# Altium PCB Awtrix Finally.pcbdoc (part 4 of 4)
Units mil, origin at the board's own origin, x right, y up, seen from the top; angles counter-clockwise.
Board outline 8820 x 2812 mil, 2 copper layers (Top Layer, Bottom Layer); 513 components, 259 nets, 1543 pads, 743 vias.
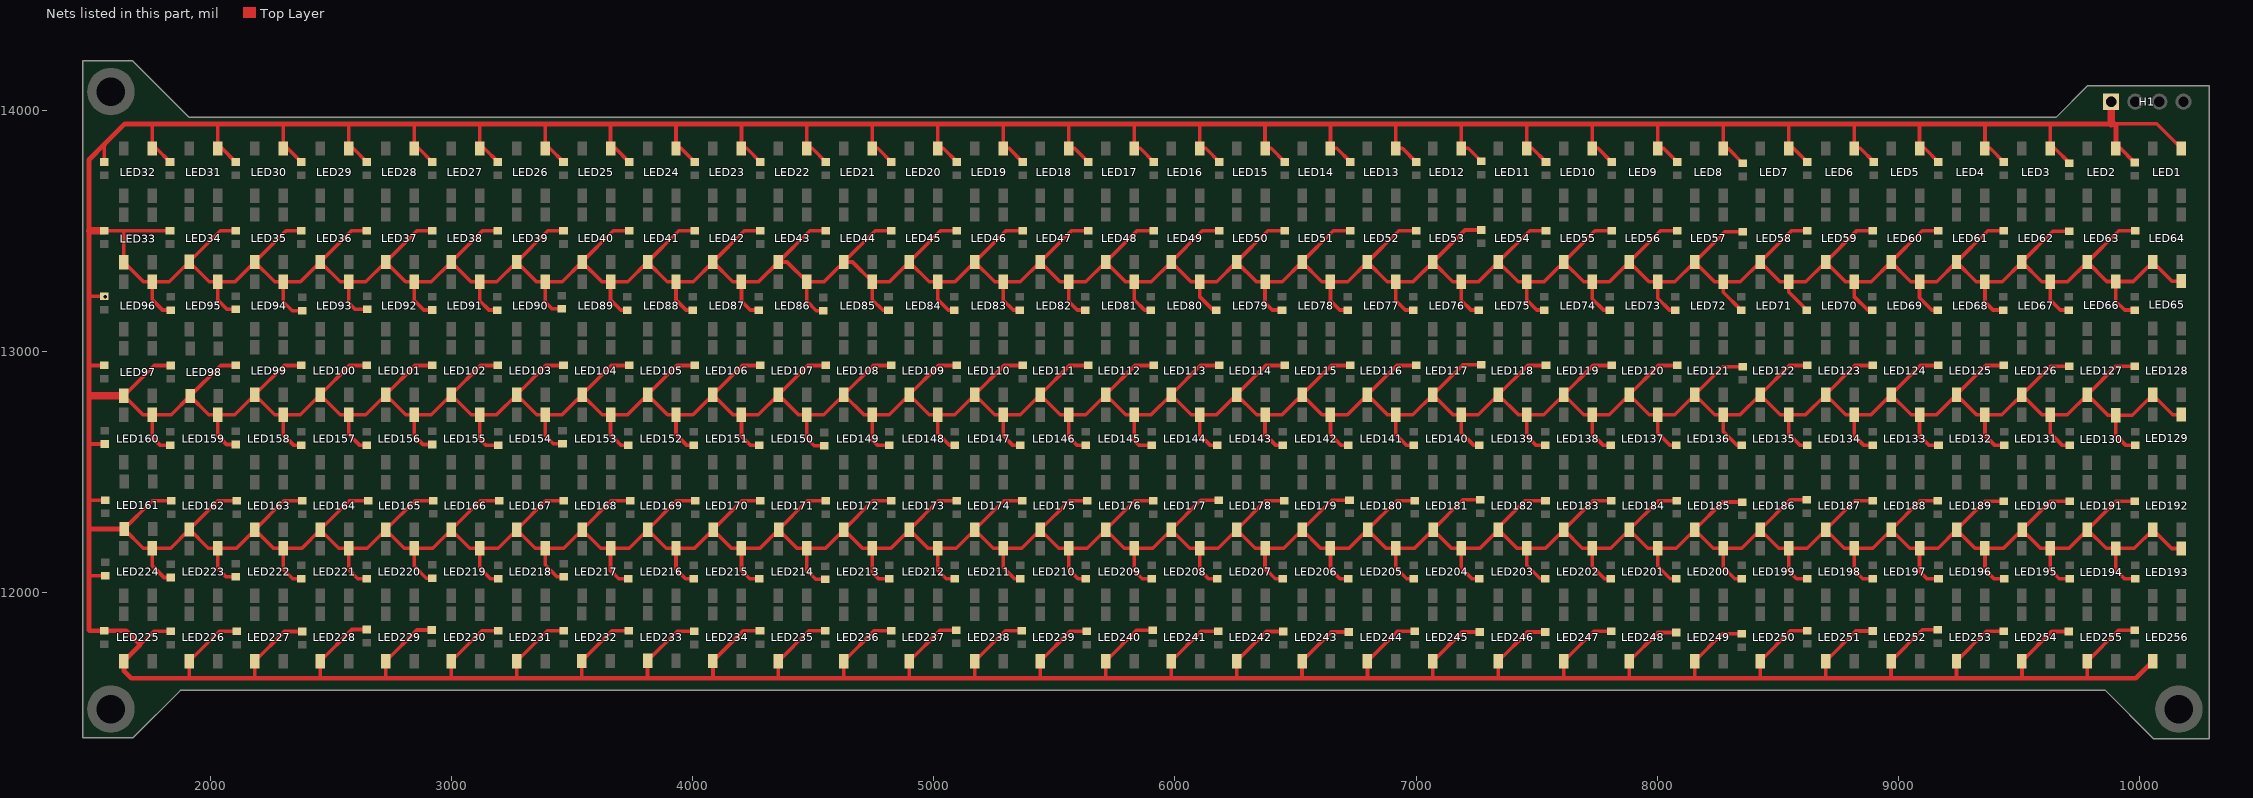
[diagram p4: the nets of this part, all layers, seen from the top]

## Via types
v1: diameter 20, hole 15, Top Layer to Bottom Layer, 743 vias

## Nets (pads, with @x,y where several pads share a name; then routed paths per layer and width w, separated by ;. In a path a pad name is that pad's centre, name@x,y a point inside that pad or via, vN(x,y) a via of type N, cw(c..) or ccw(c..) an arc to the next point about the centre after c; other vN are vias at no path point) (continued)
VCC: C1.2 C2.2 C3.2 C4.2 C5.2 C6.2 C7.2 C8.2 C9.2 C10.2 C11.2 C12.2 C13.2 C14.2 C15.2 C16.2 C17.2 C18.2 C19.2 C20.2 C21.2 C22.2 C23.2 C24.2 C25.2 C26.2 C27.2 C28.2 C29.2 C30.2 C31.2 C32.2 C33.2 C34.2 C35.2 C36.2 C37.2 C38.2 C39.2 C40.2 C41.2 C42.2 C43.2 C44.2 C45.2 C46.2 C47.2 C48.2 C49.2 C50.2 C51.2 C52.2 C53.2 C54.2 C55.2 C56.2 C57.2 C58.2 C59.2 C60.2 C61.2 C62.2 C63.2 C64.2 C65.2 C66.2 C67.2 C68.2 C69.2 C70.2 C71.2 C72.2 C73.2 C74.2 C75.2 C76.2 C77.2 C78.2 C79.2 C80.2 C81.2 C82.2 C83.2 C84.2 C85.2 C86.2 C87.2 C88.2 C89.2 C90.2 C91.2 C92.2 C93.2 C94.2 C95.2 C96.2 C97.2 C98.2 C99.2 C100.2 C101.2 C102.2 C103.2 C104.2 C105.2 C106.2 C107.2 C108.2 C109.2 C110.2 C111.2 C112.2 C113.2 C114.2 C115.2 C116.2 C117.2 C118.2 C119.2 C120.2 C121.2 C122.2 C123.2 C124.2 C125.2 C126.2 C127.2 C128.2 C129.2 C130.2 C131.2 C132.2 C133.2 C134.2 C135.2 C136.2 C137.2 C138.2 C139.2 C140.2 C141.2 C142.2 C143.2 C144.2 C145.2 C146.2 C147.2 C148.2 C149.2 C150.2 C151.2 C152.2 C153.2 C154.2 C155.2 C156.2 C157.2 C158.2 C159.2 C160.2 C161.2 C162.2 C163.2 C164.2 C165.2 C166.2 C167.2 C168.2 C169.2 C170.2 C171.2 C172.2 C173.2 C174.2 C175.2 C176.2 C177.2 C178.2 C179.2 C180.2 C181.2 C182.2 C183.2 C184.2 C185.2 C186.2 C187.2 C188.2 C189.2 C190.2 C191.2 C192.2 C193.2 C194.2 C195.2 C196.2 C197.2 C198.2 C199.2 C200.2 C201.2 C202.2 C203.2 C204.2 C205.2 C206.2 C207.2 C208.2 C209.2 C210.2 C211.2 C212.2 C213.2 C214.2 C215.2 C216.2 C217.2 C218.2 C219.2 C220.2 C221.2 C222.2 C223.2 C224.2 C225.2 C226.2 C227.2 C228.2 C229.2 C230.2 C231.2 C232.2 C233.2 C234.2 C235.2 C236.2 C237.2 C238.2 C239.2 C240.2 C241.2 C242.2 C243.2 C244.2 C245.2 C246.2 C247.2 C248.2 C249.2 C250.2 C251.2 C252.2 C253.2 C254.2 C255.2 C256.2 H1.1 LED1.1 LED2.1 LED3.1 LED4.1 LED5.1 LED6.1 LED7.1 LED8.1 LED9.1 LED10.1 LED11.1 LED12.1 LED13.1 LED14.1 LED15.1 LED16.1 LED17.1 LED18.1 LED19.1 LED20.1 LED21.1 LED22.1 LED23.1 LED24.1 LED25.1 LED26.1 LED27.1 LED28.1 LED29.1 LED30.1 LED31.1 LED32.1 LED33.1 LED34.1 LED35.1 LED36.1 LED37.1 LED38.1 LED39.1 LED40.1 LED41.1 LED42.1 LED43.1 LED44.1 LED45.1 LED46.1 LED47.1 LED48.1 LED49.1 LED50.1 LED51.1 LED52.1 LED53.1 LED54.1 LED55.1 LED56.1 LED57.1 LED58.1 LED59.1 LED60.1 LED61.1 LED62.1 LED63.1 LED64.1 LED65.1 LED66.1 LED67.1 LED68.1 LED69.1 LED70.1 LED71.1 LED72.1 LED73.1 LED74.1 LED75.1 LED76.1 LED77.1 LED78.1 LED79.1 LED80.1 LED81.1 LED82.1 LED83.1 LED84.1 LED85.1 LED86.1 LED87.1 LED88.1 LED89.1 LED90.1 LED91.1 LED92.1 LED93.1 LED94.1 LED95.1 LED96.1 LED97.1 LED98.1 LED99.1 LED100.1 LED101.1 LED102.1 LED103.1 LED104.1 LED105.1 LED106.1 LED107.1 LED108.1 LED109.1 LED110.1 LED111.1 LED112.1 LED113.1 LED114.1 LED115.1 LED116.1 LED117.1 LED118.1 LED119.1 LED120.1 LED121.1 LED122.1 LED123.1 LED124.1 LED125.1 LED126.1 LED127.1 LED128.1 LED129.1 LED130.1 LED131.1 LED132.1 LED133.1 LED134.1 LED135.1 LED136.1 LED137.1 LED138.1 LED139.1 LED140.1 LED141.1 LED142.1 LED143.1 LED144.1 LED145.1 LED146.1 LED147.1 LED148.1 LED149.1 LED150.1 LED151.1 LED152.1 LED153.1 LED154.1 LED155.1 LED156.1 LED157.1 LED158.1 LED159.1 LED160.1 LED161.1 LED162.1 LED163.1 LED164.1 LED165.1 LED166.1 LED167.1 LED168.1 LED169.1 LED170.1 LED171.1 LED172.1 LED173.1 LED174.1 LED175.1 LED176.1 LED177.1 LED178.1 LED179.1 LED180.1 LED181.1 LED182.1 LED183.1 LED184.1 LED185.1 LED186.1 LED187.1 LED188.1 LED189.1 LED190.1 LED191.1 LED192.1 LED193.1 LED194.1 LED195.1 LED196.1 LED197.1 LED198.1 LED199.1 LED200.1 LED201.1 LED202.1 LED203.1 LED204.1 LED205.1 LED206.1 LED207.1 LED208.1 LED209.1 LED210.1 LED211.1 LED212.1 LED213.1 LED214.1 LED215.1 LED216.1 LED217.1 LED218.1 LED219.1 LED220.1 LED221.1 LED222.1 LED223.1 LED224.1 LED225.1 LED226.1 LED227.1 LED228.1 LED229.1 LED230.1 LED231.1 LED232.1 LED233.1 LED234.1 LED235.1 LED236.1 LED237.1 LED238.1 LED239.1 LED240.1 LED241.1 LED242.1 LED243.1 LED244.1 LED245.1 LED246.1 LED247.1 LED248.1 LED249.1 LED250.1 LED251.1 LED252.1 LED253.1 LED254.1 LED255.1 LED256.1 | length 107613.2
  Top Layer w15: 1496,11845 1498.44,11842.56 ; 1496,12073 1497.56,12071.44 C50.2@1563,12071.44 ; 1496,12619 1497.56,12617.44 C197.2@1562,12617.44 ; 1497,13232 1499.44,13229.56 C97.2@1560,13229.56 ; 1498.44,12384.56 C81.2@1563,12384.56 ; 1501,12943.11 C154.2@1560,12943.11 ; C126.2@1560,13501.96 1640.95,13501.96 ; C109.2@1560,13786.96 1560,13860 ; 1708.91,11784.53 1764.93,11840.56 C61.2@1836,11840.56 ; 1765,13945 1759.05,13939.05 LED32.1@1759.05,13843.43 1775.54,13843.43 C167.2@1832,13786.96 ; C184.2@1832,13501.96 1640.95,13501.96 ; C75.2@1832.96,12612.85 1790.15,12612.85 1759.06,12643.94 LED160.1@1759.06,12738.53 ; C62.2@1835,12063.44 1806.99,12063.44 1759.06,12111.38 LED224.1@1759.06,12185.14 ; C155.2@1835,12943 1766.52,12943 LED97.1@1640.95,12817.43 1719.85,12738.53 LED160.1@1759.06,12738.53 ; C73.2@1835,13172.89 1801.11,13172.89 1759.06,13214.94 LED96.1@1759.06,13290 ; C82.2@1837.4,12381.65 1758.35,12381.65 LED161.1@1641.35,12264.65 1720.86,12185.14 LED224.1@1759.06,12185.14 ; 1918,11646 1912.4,11651.6 LED226.1@1912.4,11716.57 2036.38,11840.56 C63.2@2108,11840.56 ; 2025,13945 2030.5,13939.5 LED31.1@2030.5,13843.43 2047.54,13843.43 C227.2@2104,13786.96 ; C156.2@2104,12943.11 2041.96,12943.11 LED98.1@1915,12816.15 ; C244.2@2104,13501.96 2040.71,13501.96 LED34.1@1911.9,13373.15 ; C37.2@2105,12066 2065,12066 2030.51,12100.49 LED223.1@2030.51,12185.14 ; C67.2@2105,12615.41 2066.59,12615.41 2030.51,12651.49 LED159.1@2030.51,12738.53 ; C251.2@2105,13175.44 2069.55,13175.44 2030.51,13214.49 LED95.1@2030.51,13290 ; C83.2@2109.4,12381.65 2031.23,12381.65 LED162.1@1912.8,12263.22 ; 2186,11646 2183.85,11648.15 LED227.1@2183.85,11716.57 2307.13,11839.85 C64.2@2381,11839.85 ; 2301.95,13945 LED30.1@2301.95,13843.43 2319.54,13843.43 C110.2@2376,13786.96 ; C157.2@2376,12943.11 2305.24,12943.11 LED99.1@2183.85,12821.72 ; C125.2@2376,13501.96 2313.52,13501.96 LED35.1@2183.85,13372.29 ; C36.2@2376.96,12058.7 2341.3,12058.7 2301.96,12098.04 LED222.1@2301.96,12185.14 ; C226.2@2376.96,12612.85 2344.15,12612.85 2301.96,12655.04 LED158.1@2301.96,12738.53 ; C191.2@2380,13170.44 2338.55,13170.44 2301.96,13207.04 LED94.1@2301.96,13290 ; C84.2@2381.41,12381.65 2304.11,12381.65 LED163.1@2184.25,12261.79 ; 2456,11646 2455.3,11646.7 LED228.1@2455.3,11716.57 2586.73,11848 C60.2@2648,11848 ; 2573.4,13945 LED29.1@2573.4,13843.43 2591.54,13843.43 C168.2@2648.01,13786.96 ; C158.2@2648.01,12943.11 2576.69,12943.11 LED100.1@2455.3,12821.72 ; C183.2@2648.01,13501.96 2584.98,13501.96 LED36.1@2455.3,13372.29 ; C24.2@2648.96,12058.7 2611.3,12058.7 2573.41,12096.59 LED221.1@2573.41,12185.14 ; C225.2@2648.96,12612.85 2618.15,12612.85 2573.41,12657.59 LED157.1@2573.41,12738.53 ; C133.2@2650,13175.44 2600.55,13175.44 2573.41,13202.59 LED93.1@2573.41,13290 ; C85.2@2653.41,12381.65 2575.56,12381.65 LED164.1@2455.7,12261.79 ; 2728,11646 2726.75,11647.25 LED229.1@2726.75,11716.57 2856.05,11845.87 C57.2@2917.75,11845.87 ; 2850,13945 2844.85,13939.85 LED28.1@2844.85,13843.43 2863.54,13843.43 C228.2@2920.01,13786.96 ; C25.2@2920,12061 2895,12061 2844.86,12111.14 LED220.1@2844.86,12185.14 ; C224.2@2920,12615.41 2881.59,12615.41 2844.86,12652.14 LED156.1@2844.86,12738.53 ; C159.2@2920.01,12943.11 2848.15,12943.11 LED101.1@2726.75,12821.72 ; C77.2@2920,13173 2884,13173 2844.86,13212.14 LED92.1@2844.86,13290 ; C243.2@2920.01,13501.96 2856.43,13501.96 LED37.1@2726.75,13372.29 ; C86.2@2923,12382.56 2847.92,12382.56 LED165.1@2727.16,12261.79 ; 3002,11646 2998.21,11649.79 LED230.1@2998.21,11716.57 3124.8,11843.17 C6.2@3192.76,11843.17 ; 3110,13945 3116.3,13938.7 LED27.1@3116.3,13843.43 3135.55,13843.43 C111.2@3192.01,13786.96 ; C69.2@3189.97,13172.89 3155.11,13172.89 3116.31,13211.69 LED91.1@3116.31,13290 ; C160.2@3192.01,12943.11 3119.6,12943.11 LED102.1@2998.21,12821.72 ; C124.2@3192.01,13501.96 3127.88,13501.96 LED38.1@2998.21,13372.29 ; C26.2@3192.96,12058.7 3161.3,12058.7 3116.31,12103.69 LED219.1@3116.31,12185.14 ; C223.2@3192.96,12612.85 3142.15,12612.85 3116.31,12638.69 LED155.1@3116.31,12738.53 ; C87.2@3197.41,12381.65 3118.46,12381.65 LED166.1@2998.61,12261.79 ; 3266,11646 3269.66,11649.66 LED231.1@3269.66,11716.57 3396.25,11843.17 C58.2@3464.76,11843.17 ; 3385,13945 3387.75,13942.25 LED26.1@3387.75,13843.43 3407.55,13843.43 C169.2@3464.01,13786.96 ; C250.2@3456.97,13177.89 3416.11,13177.89 3387.76,13206.24 LED90.1@3387.76,13290 ; C222.2@3459.97,12617.85 3422.15,12617.85 3387.76,12652.24 LED154.1@3387.76,12738.53 ; C161.2@3464.01,12943.11 3391.05,12943.11 LED103.1@3269.66,12821.72 ; C182.2@3464.01,13501.96 3399.33,13501.96 LED39.1@3269.66,13372.29 ; C27.2@3465,12066 3438,12066 3387.76,12116.24 LED218.1@3387.76,12185.14 ; C88.2@3465,12381.56 3389.82,12381.56 LED167.1@3270.06,12261.79 ; 3538,11646 3540,11648 LED232.1@3540,11717.15 3666.41,11843.56 C59.2@3735,11843.56 ; 3660,13945 3659.21,13944.21 LED25.1@3659.21,13843.43 3679.55,13843.43 C229.2@3736.01,13786.96 ; C190.2@3728.97,13172.89 3701.11,13172.89 3659.22,13214.78 LED89.1@3659.22,13290 ; C28.2@3731.97,12058.7 3693.3,12058.7 3659.22,12092.78 LED217.1@3659.22,12185.14 ; C221.2@3731.97,12612.85 3701.15,12612.85 3659.22,12654.78 LED153.1@3659.22,12738.53 ; C162.2@3736.01,12943.11 3662.5,12943.11 LED104.1@3541.11,12821.72 ; C242.2@3736.01,13501.96 3670.78,13501.96 LED40.1@3541.11,13372.29 ; C89.2@3741.41,12381.65 3661.37,12381.65 LED168.1@3541.51,12261.79 ; 3820,11646 3812.57,11653.43 LED233.1@3812.57,11718.15 3935.29,11840.87 C7.2@4005.75,11840.87 ; 3925,13945 3930.66,13939.34 LED24.1@3930.66,13843.43 3951.55,13843.43 C112.2@4008.01,13786.96 ; C132.2@4000.97,13172.89 3972.11,13172.89 3930.67,13214.33 LED88.1@3930.67,13290 ; C29.2@4003.97,12058.7 3970.3,12058.7 3930.67,12098.33 LED216.1@3930.67,12185.14 ; C220.2@4003.97,12612.85 3974.15,12612.85 3930.67,12656.33 LED152.1@3930.67,12738.53 ; C163.2@4008.01,12943.11 3933.95,12943.11 LED105.1@3812.56,12821.72 ; C127.2@4008.01,13501.96 3942.23,13501.96 LED41.1@3812.56,13372.29 ; C90.2@4010,12381.56 3932.72,12381.56 LED169.1@3812.96,12261.79 ; 4084,11646 LED234.1@4084,11717.15 4208.85,11842 C56.2@4279,11842 ; 4202.12,12092.88 4236.3,12058.7 C3.2@4275.97,12058.7 ; 4202.12,12096.12 LED215.1@4202.12,12185.14 ; 4210,13945 4202.11,13937.11 LED23.1@4202.11,13843.43 4223.55,13843.43 C170.2@4280.01,13786.96 ; C76.2@4272.97,13172.89 4238.11,13172.89 4202.12,13208.88 LED87.1@4202.12,13290 ; C219.2@4275.97,12612.85 4238.15,12612.85 4202.12,12648.88 LED151.1@4202.12,12738.53 ; C164.2@4280.01,12943.11 4205.4,12943.11 LED106.1@4084.01,12821.72 ; C185.2@4280.01,13501.96 4213.69,13501.96 LED42.1@4084.01,13372.29 ; C91.2@4281,12381.56 4204.18,12381.56 LED170.1@4084.41,12261.79 ; 4353,11646 4355.46,11648.46 LED235.1@4355.46,11716.57 4481.44,11842.56 C55.2@4550,11842.56 ; 4470,13945 4473.56,13941.44 LED22.1@4473.56,13843.43 4495.55,13843.43 C230.2@4552.02,13786.96 ; C68.2@4542,13169.85 4512.15,13169.85 4473.57,13208.43 LED86.1@4473.57,13290 ; C218.2@4545,12609.82 4504.04,12609.82 4473.57,12640.28 LED150.1@4473.57,12738.53 ; C30.2@4550,12055.89 4510.11,12055.89 4473.57,12092.43 LED214.1@4473.57,12185.14 ; C92.2@4552,12381.56 4475.63,12381.56 LED171.1@4355.86,12261.79 ; C165.2@4552.02,12943.11 4476.86,12943.11 LED107.1@4355.46,12821.72 ; C245.2@4552.02,13501.96 4485.14,13501.96 LED43.1@4355.46,13372.29 ; 4625,11646 4626.91,11647.91 LED236.1@4626.91,11716.57 4753.9,11843.56 C54.2@4823,11843.56 ; 4750,13945 4745.01,13940.01 LED21.1@4745.01,13843.43 4767.55,13843.43 C113.2@4824.02,13786.96 ; C249.2@4811.97,13172.89 4788.11,13172.89 4745.02,13215.98 LED85.1@4745.02,13290 ; C31.2@4814.97,12058.7 4770.3,12058.7 4745.02,12083.98 LED213.1@4745.02,12185.14 ; C217.2@4814.97,12612.85 4766.15,12612.85 4745.02,12633.98 LED149.1@4745.02,12738.53 ; C93.2@4823,12381.56 4747.08,12381.56 LED172.1@4627.32,12261.79 ; C166.2@4824.02,12943.11 4748.31,12943.11 LED108.1@4626.91,12821.72 ; C128.2@4824.02,13501.96 4756.59,13501.96 LED44.1@4626.91,13372.29 ; 4898.37,11657.37 LED237.1@4898.37,11716.57 5027.35,11845.56 C53.2@5093,11845.56 ; 5020,13945 5016.46,13941.46 LED20.1@5016.46,13843.43 5039.56,13843.43 C171.2@5096.02,13786.96 ; C189.2@5083.97,13172.89 5060.11,13172.89 5016.47,13216.53 LED84.1@5016.47,13290 ; C32.2@5086.97,12058.7 5051.3,12058.7 5016.47,12093.53 LED212.1@5016.47,12185.14 ; C216.2@5086.97,12612.85 5064.15,12612.85 5016.47,12660.53 LED148.1@5016.47,12738.53 ; C94.2@5095,12381.56 5018.53,12381.56 LED173.1@4898.77,12261.79 ; C196.2@5096.02,12943.11 5019.76,12943.11 LED109.1@4898.37,12821.72 ; C186.2@5096.02,13501.96 5028.04,13501.96 LED45.1@4898.37,13372.29 ; 5171,11646 5169.82,11647.18 LED238.1@5169.82,11716.57 5295.8,11842.56 C52.2@5365,11842.56 ; 5285,13945 5287.91,13942.09 LED19.1@5287.91,13843.43 5311.56,13843.43 C231.2@5368.02,13786.96 ; C131.2@5355.98,13172.89 5329.11,13172.89 5287.93,13214.08 LED83.1@5287.93,13290 ; C33.2@5358.97,12058.7 5334.3,12058.7 5287.93,12105.08 LED211.1@5287.93,12185.14 ; C215.2@5358.97,12612.85 5326.15,12612.85 5287.93,12651.08 LED147.1@5287.93,12738.53 ; C95.2@5366,12381.56 5289.98,12381.56 LED174.1@5170.22,12261.79 ; C256.2@5368.02,12943.11 5291.21,12943.11 LED110.1@5169.82,12821.72 ; C246.2@5368.02,13501.96 5299.49,13501.96 LED46.1@5169.82,13372.29 ; 5438,11646 5441.27,11649.27 LED239.1@5441.27,11716.57 5564.7,11840 C51.2@5635,11840 ; 5560,13945 5559.37,13944.37 LED18.1@5559.37,13843.43 5583.56,13843.43 C187.2@5640.02,13786.96 ; C188.2@5627.98,13172.89 5595.11,13172.89 5559.38,13208.62 LED82.1@5559.38,13290 ; C34.2@5630.98,12058.7 5598.3,12058.7 5559.38,12097.62 LED210.1@5559.38,12185.14 ; C214.2@5630.98,12612.85 5592.59,12612.85 5559.38,12646.07 LED146.1@5559.38,12738.53 ; C96.2@5637,12382.56 5562.43,12382.56 LED175.1@5441.67,12261.79 ; C66.2@5640.02,12943.11 5562.66,12943.11 LED111.1@5441.27,12821.72 ; C129.2@5640.02,13501.96 5570.94,13501.96 LED47.1@5441.27,13372.29 ; 5712.72,11646.01 LED240.1@5712.72,11716.57 5841.7,11845.56 C40.2@5908,11845.56 ; 5825,13945 5830.82,13939.18 LED17.1@5830.82,13843.43 5855.56,13843.43 C115.2@5912.02,13786.96 ; C130.2@5899.98,13172.89 5874.11,13172.89 5830.83,13216.17 LED81.1@5830.83,13290 ; C35.2@5902.98,12058.7 5864.3,12058.7 5830.83,12092.17 LED209.1@5830.83,12185.14 ; C213.2@5902.98,12612.85 5849.56,12612.85 5830.83,12631.58 LED145.1@5830.83,12738.53 ; C138.2@5911,12381.56 5832.88,12381.56 LED176.1@5713.12,12261.79 ; C72.2@5912.02,12943.11 5834.11,12943.11 LED112.1@5712.72,12821.72 ; C123.2@5912.02,13501.96 5842.39,13501.96 LED48.1@5712.72,13372.29 ; 5982,11646 5984.17,11648.17 LED241.1@5984.17,11716.57 6108.15,11840.56 C41.2@6179,11840.56 ; 6105,13945 6102.27,13942.27 LED16.1@6102.27,13843.43 6127.56,13843.43 C173.2@6184.02,13786.96 ; C65.2@6171.98,13172.89 6158.11,13172.89 6102.28,13228.72 LED80.1@6102.28,13290 ; C19.2@6174.98,12058.7 6139.3,12058.7 6102.28,12095.72 LED208.1@6102.28,12185.14 ; C212.2@6174.98,12612.85 6145.15,12612.85 6102.28,12655.72 LED144.1@6102.28,12738.53 ; C139.2@6181,12383.56 6106.34,12383.56 LED177.1@5984.57,12261.79 ; C80.2@6184.02,12943.11 6105.56,12943.11 LED113.1@5984.17,12821.72 ; C181.2@6184.02,13501.96 6113.85,13501.96 LED49.1@5984.17,13372.29 ; 6253,11646 6255.62,11648.62 LED242.1@6255.62,11716.57 6378.61,11839.56 C42.2@6449,11839.56 ; 6375,13945 6373.72,13943.72 LED15.1@6373.72,13843.43 6399.56,13843.43 C233.2@6456.03,13786.96 ; C255.2@6443.98,13172.89 6404.11,13172.89 6373.73,13203.27 LED79.1@6373.73,13290 ; C2.2@6446.98,12058.7 6416.3,12058.7 6373.73,12101.27 LED207.1@6373.73,12185.14 ; C211.2@6446.98,12612.85 6417.15,12612.85 6373.73,12656.27 LED143.1@6373.73,12738.53 ; C140.2@6454,12381.56 6375.79,12381.56 LED178.1@6256.03,12261.79 ; C136.2@6456.03,12943.11 6377.02,12943.11 LED114.1@6255.62,12821.72 ; C241.2@6456.03,13501.96 6385.3,13501.96 LED50.1@6255.62,13372.29 ; 6527,11646 6527.07,11646.08 LED243.1@6527.07,11716.57 6648.06,11837.56 C10.2@6720,11837.56 ; 6645,13945 6645.17,13944.83 LED14.1@6645.17,13843.43 6671.56,13843.43 C114.2@6728.03,13786.96 ; C195.2@6715.98,13172.89 6683.11,13172.89 6645.18,13210.82 LED78.1@6645.18,13290 ; C47.2@6718.98,12058.7 6684.3,12058.7 6645.18,12097.82 LED206.1@6645.18,12185.14 ; C210.2@6718.98,12612.85 6688.15,12612.85 6645.18,12655.82 LED142.1@6645.18,12738.53 ; C141.2@6724,12384.56 6650.24,12384.56 LED179.1@6527.48,12261.79 ; C194.2@6728.03,12943.11 6648.47,12943.11 LED115.1@6527.07,12821.72 ; C122.2@6728.03,13501.96 6656.75,13501.96 LED51.1@6527.07,13372.29 ; 6797,11646 6798.53,11647.53 LED244.1@6798.53,11716.57 6921.95,11840 C1.2@6995,11840 ; 6920,13945 6916.62,13941.62 LED13.1@6916.62,13843.43 6943.57,13843.43 C172.2@7000.03,13786.96 ; C137.2@6987.98,13172.89 6955.11,13172.89 6916.63,13211.37 LED77.1@6916.63,13290 ; C17.2@6990.98,12058.7 6961.3,12058.7 6916.63,12103.37 LED205.1@6916.63,12185.14 ; C209.2@6990.98,12612.85 6959.15,12612.85 6916.63,12655.37 LED141.1@6916.63,12738.53 ; C142.2@6995,12382.56 6919.69,12382.56 LED180.1@6798.93,12261.79 ; C254.2@7000.03,12943.11 6919.92,12943.11 LED116.1@6798.53,12821.72 ; C180.2@7000.03,13501.96 6928.2,13501.96 LED52.1@6798.53,13372.29 ; 7068,11646 7069.98,11647.98 LED245.1@7069.98,11716.57 7190.96,11837.56 C43.2@7265,11837.56 ; 7190,13945 7188.07,13943.08 LED12.1@7188.07,13843.43 7216.57,13843.43 C232.2@7270,13790 ; C108.2@7259.99,13172.89 7228.11,13172.89 7188.09,13212.91 LED76.1@7188.09,13290 ; C39.2@7262.98,12058.7 7232.3,12058.7 7188.09,12102.91 LED204.1@7188.09,12185.14 ; C208.2@7262.98,12612.85 7238.15,12612.85 7188.09,12662.91 LED140.1@7188.09,12738.53 ; C143.2@7266,12385.56 7194.14,12385.56 LED181.1@7070.38,12261.79 ; C71.2@7270,12946.15 7194.41,12946.15 LED117.1@7069.98,12821.72 ; C240.2@7270,13505 7202.69,13505 LED53.1@7069.98,13372.29 ; 7341,11646 7341.43,11646.43 LED246.1@7341.43,11716.57 7462.41,11837.56 C12.2@7535,11837.56 ; 7455,13945 7459.53,13940.47 LED11.1@7459.53,13843.43 7482.57,13843.43 C116.2@7539.03,13786.96 ; C107.2@7531.99,13172.89 7501.11,13172.89 7459.54,13214.46 LED75.1@7459.54,13290 ; C22.2@7534.99,12058.7 7515.3,12058.7 7459.54,12114.46 LED203.1@7459.54,12185.14 ; C207.2@7534.99,12612.85 7496.15,12612.85 7459.54,12649.46 LED139.1@7459.54,12738.53 ; C144.2@7537,12381.56 7451.75,12381.56 7349.2,12279 7349,12279 7349,12268.96 LED182.1@7341.83,12261.79 ; C79.2@7539.03,12943.11 7462.82,12943.11 LED118.1@7341.43,12821.72 ; C121.2@7539.03,13501.96 7471.1,13501.96 LED54.1@7341.43,13372.29 ; 7614,11646 7612.88,11647.12 LED247.1@7612.88,11716.57 7736.86,11840.56 C11.2@7809,11840.56 ; 7730,13945 7730.98,13944.02 LED10.1@7730.98,13843.43 7754.57,13843.43 C174.2@7811.03,13786.96 ; C106.2@7803.99,13172.89 7777.11,13172.89 7730.99,13219.01 LED74.1@7730.99,13290 ; C20.2@7806.99,12058.7 7781.3,12058.7 7730.99,12109.01 LED202.1@7730.99,12185.14 ; C206.2@7806.99,12612.85 7775.15,12612.85 7730.99,12657.01 LED138.1@7730.99,12738.53 ; C145.2@7809,12382.56 7734.05,12382.56 LED183.1@7613.28,12261.79 ; C135.2@7811.03,12943.11 7734.27,12943.11 LED119.1@7612.88,12821.72 ; C179.2@7811.03,13501.96 7742.55,13501.96 LED55.1@7612.88,13372.29 ; 7886,11646 7884.33,11647.67 LED248.1@7884.33,11716.57 8003.31,11835.56 C44.2@8080,11835.56 ; 8005,13945 8002.43,13942.43 LED9.1@8002.43,13843.43 8026.57,13843.43 C234.2@8083.03,13786.96 ; C105.2@8075.99,13172.89 8051.11,13172.89 8002.44,13221.56 LED73.1@8002.44,13290 ; C5.2@8078.99,12058.7 8054.3,12058.7 8002.44,12110.56 LED201.1@8002.44,12185.14 ; C205.2@8078.99,12612.85 8052.15,12612.85 8002.44,12662.56 LED137.1@8002.44,12738.53 ; C146.2@8081,12382.56 8005.5,12382.56 LED184.1@7884.73,12261.79 ; C193.2@8083.03,12943.11 8005.72,12943.11 LED120.1@7884.33,12821.72 ; C239.2@8083.03,13501.96 8014.01,13501.96 LED56.1@7884.33,13372.29 ; 8153,11646 8155.78,11648.78 LED249.1@8155.78,11716.57 8269.32,11830.11 C14.2@8350,11830.11 ; 8270,13945 8273.88,13941.12 LED8.1@8273.88,13843.43 8293.57,13843.43 C118.2@8355.03,13781.96 ; C104.2@8347.99,13172.89 8273.89,13246.99 LED72.1@8273.89,13290 ; C23.2@8350.99,12058.7 8321.3,12058.7 8273.89,12106.11 LED200.1@8273.89,12185.14 ; C204.2@8350.99,12612.85 8330.15,12612.85 8273.89,12669.11 LED136.1@8273.89,12738.53 ; C147.2@8353,12376.56 8270.95,12376.56 LED185.1@8156.19,12261.79 ; C253.2@8355.03,12938.11 8272.18,12938.11 LED121.1@8155.78,12821.72 ; C120.2@8355.03,13496.96 8280.46,13496.96 LED57.1@8155.78,13372.29 ; 8428,11646 8427.24,11646.76 LED250.1@8427.24,11716.57 8554.22,11843.56 C13.2@8622,11843.56 ; 8545,13945 8545.33,13944.67 LED7.1@8545.33,13843.43 8565.57,13843.43 C176.2@8622.04,13786.96 ; C103.2@8619.99,13172.89 8545.34,13247.54 LED71.1@8545.34,13290 ; C148.2@8621,12385.56 8551.4,12385.56 LED186.1@8427.64,12261.79 ; C70.2@8622.04,12943.11 8548.63,12943.11 LED122.1@8427.24,12821.72 ; C178.2@8622.04,13501.96 8556.91,13501.96 LED58.1@8427.24,13372.29 ; C49.2@8622.99,12058.7 8578.3,12058.7 8545.34,12091.66 LED199.1@8545.34,12185.14 ; C203.2@8622.99,12612.85 8591.15,12612.85 8545.34,12658.66 LED135.1@8545.34,12738.53 ; 8699.09,11646 8698.69,11646.4 LED251.1@8698.69,11716.57 8823.67,11841.56 C45.2@8894,11841.56 ; 8815,13945 8816.78,13943.22 LED6.1@8816.78,13843.43 8842.58,13843.43 C236.2@8899.04,13786.96 ; C102.2@8891.99,13172.89 8873.11,13172.89 8816.79,13229.21 LED70.1@8816.79,13290 ; C149.2@8894,12382.56 8819.85,12382.56 LED187.1@8699.09,12261.79 ; C21.2@8894.99,12058.7 8852.3,12058.7 8816.79,12094.21 LED198.1@8816.79,12185.14 ; C202.2@8894.99,12612.85 8856.15,12612.85 8816.79,12652.21 LED134.1@8816.79,12738.53 ; C78.2@8895,12943.11 8820.08,12943.11 LED123.1@8698.69,12821.72 ; C238.2@8895,13502.56 8828.95,13502.56 LED59.1@8698.69,13372.29 ; 8970.14,11654.01 LED252.1@8970.14,11716.57 9100.12,11846.56 C16.2@9163,11846.56 ; 9090,13945 9088.24,13943.24 LED5.1@9088.24,13843.43 9109.58,13843.43 C117.2@9166.04,13786.96 ; C150.2@9164,12381.56 9090.3,12381.56 LED188.1@8970.54,12261.79 ; C101.2@9164,13172.89 9139.11,13172.89 9088.25,13223.75 LED69.1@9088.25,13290 ; C134.2@9166.04,12943.11 9091.53,12943.11 LED124.1@8970.14,12821.72 ; C119.2@9166.04,13501.96 9099.81,13501.96 LED60.1@8970.14,13372.29 ; C48.2@9166.99,12058.7 9119.3,12058.7 9088.25,12089.75 LED197.1@9088.25,12185.14 ; C201.2@9166.99,12612.85 9126.15,12612.85 9088.25,12650.75 LED133.1@9088.25,12738.53 ; 9245,11646 9241.59,11649.41 LED253.1@9241.59,11716.57 9365.57,11840.56 C15.2@9438,11840.56 ; 9360,13945 9359.69,13944.69 LED4.1@9359.69,13843.43 9381.58,13843.43 C175.2@9438.04,13786.96 ; C100.2@9436,13172.89 9393.11,13172.89 9359.7,13206.3 LED68.1@9359.7,13290 ; C151.2@9438.04,12380.56 9360.75,12380.56 LED189.1@9241.99,12261.79 ; C192.2@9438.04,12943.11 9362.98,12943.11 LED125.1@9241.59,12821.72 ; C177.2@9438.04,13501.96 9371.26,13501.96 LED61.1@9241.59,13372.29 ; C8.2@9439,12058.7 9397.3,12058.7 9359.7,12096.3 LED196.1@9359.7,12185.14 ; C200.2@9439,12612.85 9399.15,12612.85 9359.7,12652.3 LED132.1@9359.7,12738.53 ; 9515,11646 9513.04,11647.96 LED254.1@9513.04,11716.57 9636.02,11839.56 C46.2@9708,11839.56 ; 9635,13945 9631.14,13941.14 LED3.1@9631.14,13843.43 9649.13,13843.43 C235.2@9710,13782.56 ; C99.2@9708,13172.89 9672.11,13172.89 9631.15,13213.85 LED67.1@9631.15,13290 ; C252.2@9710,12940.56 9631.88,12940.56 LED126.1@9513.04,12821.72 ; C237.2@9710,13500 9640.75,13500 LED62.1@9513.04,13372.29 ; C152.2@9710.4,12379.2 9630.85,12379.2 LED190.1@9513.44,12261.79 ; C9.2@9711,12058.7 9668.3,12058.7 9631.15,12095.85 LED195.1@9631.15,12185.14 ; C199.2@9711,12612.85 9679.15,12612.85 9631.15,12660.85 LED131.1@9631.15,12738.53 ; 9784,11646 9784.49,11646.49 LED255.1@9784.49,11716.57 9912.92,11845 C18.2@9980,11845 ; 9900,13945 10072.47,13945 LED1.1@10174.04,13843.43 ; LED2.1@9902.59,13843.43 9921.57,13843.43 C248.2@9980,13785 ; C74.2@9980,12940.56 9903.33,12940.56 LED127.1@9784.49,12821.72 ; C98.2@9980,13172.89 9939.11,13172.89 9902.6,13209.4 LED66.1@9902.6,13291.43 ; C153.2@9980.4,12379.2 9902.3,12379.2 LED191.1@9784.9,12261.79 ; C247.2@9982.04,13501.96 9914.17,13501.96 LED63.1@9784.49,13372.29 ; C4.2@9983,12058.7 9938.3,12058.7 9902.6,12094.4 LED194.1@9902.6,12184.43 ; C198.2@9983,12612.85 9942.56,12612.85 9902.6,12652.81 LED130.1@9902.6,12736.39 ; LED193.1@10174.05,12183.71 10134.43,12183.71 LED192.1@10056.35,12261.79 9978.98,12184.43 LED194.1@9902.6,12184.43 ; LED129.1@10174.05,12739.25 10138.42,12739.25 LED128.1@10055.94,12821.72 9970.62,12736.39 LED130.1@9902.6,12736.39 ; LED65.1@10174.05,13292.85 10135.38,13292.85 LED64.1@10055.94,13372.29 9975.08,13291.43 LED66.1@9902.6,13291.43 ; 1640.95,13501.96 LED33.1@1640.95,13370.86 1721.81,13290 LED96.1@1759.06,13290 ; LED224.1@1759.06,12185.14 1834.72,12185.14 LED162.1@1912.8,12263.22 ; LED160.1@1759.06,12738.53 1837.38,12738.53 LED98.1@1915,12816.15 ; LED96.1@1759.06,13290 1828.75,13290 LED34.1@1911.9,13373.15 ; LED34.1@1911.9,13373.15 1995.05,13290 LED95.1@2030.51,13290 ; LED162.1@1912.8,12263.22 1990.88,12185.14 LED223.1@2030.51,12185.14 ; LED98.1@1915,12816.15 1992.62,12738.53 LED159.1@2030.51,12738.53 ; LED223.1@2030.51,12185.14 2107.6,12185.14 LED163.1@2184.25,12261.79 ; LED159.1@2030.51,12738.53 2100.67,12738.53 LED99.1@2183.85,12821.72 ; LED95.1@2030.51,13290 2101.56,13290 LED35.1@2183.85,13372.29 ; LED99.1@2183.85,12821.72 2267.04,12738.53 LED158.1@2301.96,12738.53 ; LED35.1@2183.85,13372.29 2266.15,13290 LED94.1@2301.96,13290 ; LED163.1@2184.25,12261.79 2260.91,12185.14 LED222.1@2301.96,12185.14 ; LED222.1@2301.96,12185.14 2379.05,12185.14 LED164.1@2455.7,12261.79 ; LED158.1@2301.96,12738.53 2372.12,12738.53 LED100.1@2455.3,12821.72 ; LED94.1@2301.96,13290 2373.01,13290 LED36.1@2455.3,13372.29 ; LED100.1@2455.3,12821.72 2538.49,12738.53 LED157.1@2573.41,12738.53 ; LED36.1@2455.3,13372.29 2537.6,13290 LED93.1@2573.41,13290 ; LED164.1@2455.7,12261.79 2532.36,12185.14 LED221.1@2573.41,12185.14 ; LED221.1@2573.41,12185.14 2650.5,12185.14 LED165.1@2727.16,12261.79 ; LED157.1@2573.41,12738.53 2643.57,12738.53 LED101.1@2726.75,12821.72 ; LED93.1@2573.41,13290 2644.46,13290 LED37.1@2726.75,13372.29 ; LED101.1@2726.75,12821.72 2809.94,12738.53 LED156.1@2844.86,12738.53 ; LED37.1@2726.75,13372.29 2809.05,13290 LED92.1@2844.86,13290 ; LED165.1@2727.16,12261.79 2803.81,12185.14 LED220.1@2844.86,12185.14 ; LED220.1@2844.86,12185.14 2921.96,12185.14 LED166.1@2998.61,12261.79 ; LED156.1@2844.86,12738.53 2915.02,12738.53 LED102.1@2998.21,12821.72 ; LED92.1@2844.86,13290 2915.91,13290 LED38.1@2998.21,13372.29 ; LED102.1@2998.21,12821.72 3081.39,12738.53 LED155.1@3116.31,12738.53 ; LED38.1@2998.21,13372.29 3080.5,13290 LED91.1@3116.31,13290 ; LED166.1@2998.61,12261.79 3075.26,12185.14 LED219.1@3116.31,12185.14 ; LED219.1@3116.31,12185.14 3193.41,12185.14 LED167.1@3270.06,12261.79 ; LED155.1@3116.31,12738.53 3186.47,12738.53 LED103.1@3269.66,12821.72 ; LED91.1@3116.31,13290 3187.36,13290 LED39.1@3269.66,13372.29 ; LED103.1@3269.66,12821.72 3352.84,12738.53 LED154.1@3387.76,12738.53 ; LED39.1@3269.66,13372.29 3351.95,13290 LED90.1@3387.76,13290 ; LED167.1@3270.06,12261.79 3346.71,12185.14 LED218.1@3387.76,12185.14 ; LED218.1@3387.76,12185.14 3464.86,12185.14 LED168.1@3541.51,12261.79 ; LED154.1@3387.76,12738.53 3457.92,12738.53 LED104.1@3541.11,12821.72 ; LED90.1@3387.76,13290 3458.81,13290 LED40.1@3541.11,13372.29 ; LED104.1@3541.11,12821.72 3624.29,12738.53 LED153.1@3659.22,12738.53 ; LED40.1@3541.11,13372.29 3623.4,13290 LED89.1@3659.22,13290 ; LED168.1@3541.51,12261.79 3618.16,12185.14 LED217.1@3659.22,12185.14 ; LED217.1@3659.22,12185.14 3736.31,12185.14 LED169.1@3812.96,12261.79 ; LED153.1@3659.22,12738.53 3729.37,12738.53 LED105.1@3812.56,12821.72 ; LED89.1@3659.22,13290 3730.27,13290 LED41.1@3812.56,13372.29 ; LED105.1@3812.56,12821.72 3895.75,12738.53 LED152.1@3930.67,12738.53 ; LED41.1@3812.56,13372.29 3894.85,13290 LED88.1@3930.67,13290 ; LED169.1@3812.96,12261.79 3889.61,12185.14 LED216.1@3930.67,12185.14 ; LED216.1@3930.67,12185.14 4007.76,12185.14 LED170.1@4084.41,12261.79 ; LED152.1@3930.67,12738.53 4000.83,12738.53 LED106.1@4084.01,12821.72 ; LED88.1@3930.67,13290 4001.72,13290 LED42.1@4084.01,13372.29 ; LED106.1@4084.01,12821.72 4167.2,12738.53 LED151.1@4202.12,12738.53 ; LED42.1@4084.01,13372.29 4166.31,13290 LED87.1@4202.12,13290 ; LED170.1@4084.41,12261.79 4161.07,12185.14 LED215.1@4202.12,12185.14 ; LED215.1@4202.12,12185.14 4279.21,12185.14 LED171.1@4355.86,12261.79 ; LED151.1@4202.12,12738.53 4272.28,12738.53 LED107.1@4355.46,12821.72 ; LED87.1@4202.12,13290 4273.17,13290 LED43.1@4355.46,13372.29 ; LED107.1@4355.46,12821.72 4438.65,12738.53 LED150.1@4473.57,12738.53 ; LED43.1@4355.46,13372.29 4391.28,13372.29 LED86.1@4473.57,13290 ; LED171.1@4355.86,12261.79 4432.52,12185.14 LED214.1@4473.57,12185.14 ; LED214.1@4473.57,12185.14 4550.66,12185.14 LED172.1@4627.32,12261.79 ; LED150.1@4473.57,12738.53 4543.73,12738.53 LED108.1@4626.91,12821.72 ; LED86.1@4473.57,13290 4544.62,13290 LED44.1@4626.91,13372.29 ; LED108.1@4626.91,12821.72 4710.1,12738.53 LED149.1@4745.02,12738.53 ; LED44.1@4626.91,13372.29 4662.73,13372.29 LED85.1@4745.02,13290 ; LED172.1@4627.32,12261.79 4703.97,12185.14 LED213.1@4745.02,12185.14 ; LED213.1@4745.02,12185.14 4822.12,12185.14 LED173.1@4898.77,12261.79 ; LED149.1@4745.02,12738.53 4815.18,12738.53 LED109.1@4898.37,12821.72 ; LED85.1@4745.02,13290 4816.07,13290 LED45.1@4898.37,13372.29 ; LED109.1@4898.37,12821.72 4981.55,12738.53 LED148.1@5016.47,12738.53 ; LED45.1@4898.37,13372.29 4980.66,13290 LED84.1@5016.47,13290 ; LED173.1@4898.77,12261.79 4975.42,12185.14 LED212.1@5016.47,12185.14 ; LED212.1@5016.47,12185.14 5093.57,12185.14 LED174.1@5170.22,12261.79 ; LED148.1@5016.47,12738.53 5086.63,12738.53 LED110.1@5169.82,12821.72 ; LED84.1@5016.47,13290 5087.52,13290 LED46.1@5169.82,13372.29 ; LED110.1@5169.82,12821.72 5253,12738.53 LED147.1@5287.93,12738.53 ; LED46.1@5169.82,13372.29 5252.11,13290 LED83.1@5287.93,13290 ; LED174.1@5170.22,12261.79 5246.87,12185.14 LED211.1@5287.93,12185.14 ; LED211.1@5287.93,12185.14 5365.02,12185.14 LED175.1@5441.67,12261.79 ; LED147.1@5287.93,12738.53 5358.08,12738.53 LED111.1@5441.27,12821.72 ; LED83.1@5287.93,13290 5358.97,13290 LED47.1@5441.27,13372.29 ; LED111.1@5441.27,12821.72 5524.45,12738.53 LED146.1@5559.38,12738.53 ; LED47.1@5441.27,13372.29 5523.56,13290 LED82.1@5559.38,13290 ; LED175.1@5441.67,12261.79 5518.32,12185.14 LED210.1@5559.38,12185.14 ; LED210.1@5559.38,12185.14 5636.47,12185.14 LED176.1@5713.12,12261.79 ; LED146.1@5559.38,12738.53 5629.54,12738.53 LED112.1@5712.72,12821.72 ; LED82.1@5559.38,13290 5630.43,13290 LED48.1@5712.72,13372.29 ; LED112.1@5712.72,12821.72 5795.91,12738.53 LED145.1@5830.83,12738.53 ; LED48.1@5712.72,13372.29 5795.01,13290 LED81.1@5830.83,13290 ; LED176.1@5713.12,12261.79 5789.77,12185.14 LED209.1@5830.83,12185.14 ; LED209.1@5830.83,12185.14 5907.92,12185.14 LED177.1@5984.57,12261.79 ; LED145.1@5830.83,12738.53 5900.99,12738.53 LED113.1@5984.17,12821.72 ; LED81.1@5830.83,13290 5901.88,13290 LED49.1@5984.17,13372.29 ; LED113.1@5984.17,12821.72 6067.36,12738.53 LED144.1@6102.28,12738.53 ; LED49.1@5984.17,13372.29 6066.47,13290 LED80.1@6102.28,13290 ; LED177.1@5984.57,12261.79 6061.23,12185.14 LED208.1@6102.28,12185.14 ; LED208.1@6102.28,12185.14 6179.37,12185.14 LED178.1@6256.03,12261.79 ; LED144.1@6102.28,12738.53 6172.44,12738.53 LED114.1@6255.62,12821.72 ; LED80.1@6102.28,13290 6173.33,13290 LED50.1@6255.62,13372.29 ; LED114.1@6255.62,12821.72 6338.81,12738.53 LED143.1@6373.73,12738.53 ; LED50.1@6255.62,13372.29 6337.92,13290 LED79.1@6373.73,13290 ; LED178.1@6256.03,12261.79 6332.68,12185.14 LED207.1@6373.73,12185.14 ; LED207.1@6373.73,12185.14 6450.82,12185.14 LED179.1@6527.48,12261.79 ; LED143.1@6373.73,12738.53 6443.89,12738.53 LED115.1@6527.07,12821.72 ; LED79.1@6373.73,13290 6444.78,13290 LED51.1@6527.07,13372.29 ; LED115.1@6527.07,12821.72 6610.26,12738.53 LED142.1@6645.18,12738.53 ; LED51.1@6527.07,13372.29 6609.37,13290 LED78.1@6645.18,13290 ; LED179.1@6527.48,12261.79 6604.13,12185.14 LED206.1@6645.18,12185.14 ; LED206.1@6645.18,12185.14 6722.28,12185.14 LED180.1@6798.93,12261.79 ; LED142.1@6645.18,12738.53 6715.34,12738.53 LED116.1@6798.53,12821.72 ; LED78.1@6645.18,13290 6716.23,13290 LED52.1@6798.53,13372.29 ; LED116.1@6798.53,12821.72 6881.71,12738.53 LED141.1@6916.63,12738.53 ; LED52.1@6798.53,13372.29 6880.82,13290 LED77.1@6916.63,13290 ; LED180.1@6798.93,12261.79 6875.58,12185.14 LED205.1@6916.63,12185.14 ; LED205.1@6916.63,12185.14 6993.73,12185.14 LED181.1@7070.38,12261.79 ; LED141.1@6916.63,12738.53 6986.79,12738.53 LED117.1@7069.98,12821.72 ; LED77.1@6916.63,13290 6987.68,13290 LED53.1@7069.98,13372.29 ; LED117.1@7069.98,12821.72 7153.16,12738.53 LED140.1@7188.09,12738.53 ; LED53.1@7069.98,13372.29 7152.27,13290 LED76.1@7188.09,13290 ; LED181.1@7070.38,12261.79 7147.03,12185.14 LED204.1@7188.09,12185.14 ; LED204.1@7188.09,12185.14 7265.18,12185.14 LED182.1@7341.83,12261.79 ; LED140.1@7188.09,12738.53 7258.24,12738.53 LED118.1@7341.43,12821.72 ; LED76.1@7188.09,13290 7259.14,13290 LED54.1@7341.43,13372.29 ; LED118.1@7341.43,12821.72 7424.61,12738.53 LED139.1@7459.54,12738.53 ; LED54.1@7341.43,13372.29 7423.72,13290 LED75.1@7459.54,13290 ; LED182.1@7341.83,12261.79 7418.48,12185.14 LED203.1@7459.54,12185.14 ; LED203.1@7459.54,12185.14 7536.63,12185.14 LED183.1@7613.28,12261.79 ; LED139.1@7459.54,12738.53 7529.7,12738.53 LED119.1@7612.88,12821.72 ; LED75.1@7459.54,13290 7530.59,13290 LED55.1@7612.88,13372.29 ; LED119.1@7612.88,12821.72 7696.07,12738.53 LED138.1@7730.99,12738.53 ; LED55.1@7612.88,13372.29 7695.18,13290 LED74.1@7730.99,13290 ; LED183.1@7613.28,12261.79 7689.94,12185.14 LED202.1@7730.99,12185.14 ; LED202.1@7730.99,12185.14 7808.08,12185.14 LED184.1@7884.73,12261.79 ; LED138.1@7730.99,12738.53 7801.15,12738.53 LED120.1@7884.33,12821.72 ; LED74.1@7730.99,13290 7802.04,13290 LED56.1@7884.33,13372.29 ; LED120.1@7884.33,12821.72 7967.52,12738.53 LED137.1@8002.44,12738.53 ; LED56.1@7884.33,13372.29 7966.63,13290 LED73.1@8002.44,13290 ; LED184.1@7884.73,12261.79 7961.39,12185.14 LED201.1@8002.44,12185.14 ; LED201.1@8002.44,12185.14 8079.53,12185.14 LED185.1@8156.19,12261.79 ; LED137.1@8002.44,12738.53 8072.6,12738.53 LED121.1@8155.78,12821.72 ; LED73.1@8002.44,13290 8073.49,13290 LED57.1@8155.78,13372.29 ; LED121.1@8155.78,12821.72 8238.97,12738.53 LED136.1@8273.89,12738.53 ; LED57.1@8155.78,13372.29 8238.08,13290 LED72.1@8273.89,13290 ; LED185.1@8156.19,12261.79 8232.84,12185.14 LED200.1@8273.89,12185.14 ; LED200.1@8273.89,12185.14 8350.99,12185.14 LED186.1@8427.64,12261.79 ; LED136.1@8273.89,12738.53 8344.05,12738.53 LED122.1@8427.24,12821.72 ; LED72.1@8273.89,13290 8344.94,13290 LED58.1@8427.24,13372.29 ; LED122.1@8427.24,12821.72 8510.42,12738.53 LED135.1@8545.34,12738.53 ; LED58.1@8427.24,13372.29 8509.53,13290 LED71.1@8545.34,13290 ; LED186.1@8427.64,12261.79 8504.29,12185.14 LED199.1@8545.34,12185.14 ; LED199.1@8545.34,12185.14 8622.44,12185.14 LED187.1@8699.09,12261.79 ; LED135.1@8545.34,12738.53 8615.5,12738.53 LED123.1@8698.69,12821.72 ; LED71.1@8545.34,13290 8616.39,13290 LED59.1@8698.69,13372.29 ; LED123.1@8698.69,12821.72 8781.87,12738.53 LED134.1@8816.79,12738.53 ; LED59.1@8698.69,13372.29 8780.98,13290 LED70.1@8816.79,13290 ; LED187.1@8699.09,12261.79 8775.74,12185.14 LED198.1@8816.79,12185.14 ; LED198.1@8816.79,12185.14 8893.89,12185.14 LED188.1@8970.54,12261.79 ; LED134.1@8816.79,12738.53 8886.95,12738.53 LED124.1@8970.14,12821.72 ; LED70.1@8816.79,13290 8887.84,13290 LED60.1@8970.14,13372.29 ; LED124.1@8970.14,12821.72 9053.32,12738.53 LED133.1@9088.25,12738.53 ; LED60.1@8970.14,13372.29 9052.43,13290 LED69.1@9088.25,13290 ; LED188.1@8970.54,12261.79 9047.19,12185.14 LED197.1@9088.25,12185.14 ; LED197.1@9088.25,12185.14 9165.34,12185.14 LED189.1@9241.99,12261.79 ; LED133.1@9088.25,12738.53 9158.4,12738.53 LED125.1@9241.59,12821.72 ; LED69.1@9088.25,13290 9159.3,13290 LED61.1@9241.59,13372.29 ; LED125.1@9241.59,12821.72 9324.78,12738.53 LED132.1@9359.7,12738.53 ; LED61.1@9241.59,13372.29 9323.88,13290 LED68.1@9359.7,13290 ; LED189.1@9241.99,12261.79 9318.64,12185.14 LED196.1@9359.7,12185.14 ; LED196.1@9359.7,12185.14 9436.79,12185.14 LED190.1@9513.44,12261.79 ; LED132.1@9359.7,12738.53 9429.86,12738.53 LED126.1@9513.04,12821.72 ; LED68.1@9359.7,13290 9430.75,13290 LED62.1@9513.04,13372.29 ; LED126.1@9513.04,12821.72 9596.23,12738.53 LED131.1@9631.15,12738.53 ; LED62.1@9513.04,13372.29 9595.34,13290 LED67.1@9631.15,13290 ; LED190.1@9513.44,12261.79 9590.1,12185.14 LED195.1@9631.15,12185.14 ; LED195.1@9631.15,12185.14 9708.24,12185.14 LED191.1@9784.9,12261.79 ; LED131.1@9631.15,12738.53 9701.31,12738.53 LED127.1@9784.49,12821.72 ; LED67.1@9631.15,13290 9702.2,13290 LED63.1@9784.49,13372.29 ; LED127.1@9784.49,12821.72 9869.82,12736.39 LED130.1@9902.6,12736.39 ; LED63.1@9784.49,13372.29 9865.36,13291.43 LED66.1@9902.6,13291.43 ; LED191.1@9784.9,12261.79 9862.26,12184.43 LED194.1@9902.6,12184.43
  Top Layer w20: 1496,11845 1496,12073 1496,12619 1496,13796 1560,13860 1645,13945 1765,13945 2025,13945 2301.95,13945 2573.4,13945 2850,13945 3110,13945 3385,13945 3660,13945 3925,13945 4210,13945 4470,13945 4750,13945 5020,13945 5285,13945 5560,13945 5825,13945 6105,13945 6375,13945 6645,13945 6920,13945 7190,13945 7455,13945 7730,13945 8005,13945 8270,13945 8545,13945 8815,13945 9090,13945 9360,13945 9635,13945 9883,13945 9900,13945 9902.59,13942.41 LED2.1@9902.59,13843.43 ; 1498.44,11842.56 C38.2@1560,11842.56 1650.89,11842.56 1708.91,11784.53 LED225.1@1640.95,11716.57 1640.95,11677.05 1672,11646 1918,11646 2186,11646 2456,11646 2728,11646 3002,11646 3266,11646 3538,11646 3820,11646 4084,11646 4353,11646 4625,11646 5171,11646 5438,11646 5712.73,11646 5982,11646 6253,11646 6527,11646 6797,11646 7068,11646 7341,11646 7614,11646 7886,11646 8153,11646 8428,11646 8699.09,11646 9245,11646 9515,11646 9784,11646 9985.37,11646 LED256.1@10055.94,11716.57 ; 1499.65,12264.65 LED161.1@1641.35,12264.65
  Top Layer w30: 1498,13501.96 C126.2@1560,13501.96 ; 1502,12817.43 LED97.1@1640.95,12817.43 ; 9883,13945 H1.1@9883,14037
  other v1: 1563.99,13227.97
copper on no net: | length 1.4
  Top Layer w15: 1830.65,13731.85 1832,13731.85

## Polygon pours and split planes (outlines as drawn)
GND on Top Layer "Top Layer-No Net" (solid, remove dead copper, pour order 0): 1470,14207 10290,14207 10290,11395 1470,11395
GND on Bottom Layer "Top Layer-No Net" (solid, remove dead copper, pour order 2): 1470,14207 10290,14207 10290,11395 1470,11398.8

## Keep-outs
Keep-Out Layer:
  lines w10: 1470,11399 1679,11399 1875,11595 9859,11595 10059,11395 10290,11395 10290,11600 10290,14104 9786,14104 9654,13972 1912,13972 1677,14207 1470,14207 1470,13972 1470,11600 1470,11399

## Silkscreen, mask and mechanical layers (free items; w line width, h text height)
Document:
  lines w0.1: 1868.07,13401.48 1870.07,13403.48